# EAGLE board RS232_SelfPowered_Opto_Old (EAGLE 7.7.0)
RS232 Adapter using ACPL-827 Optocouplers Powered by PIC
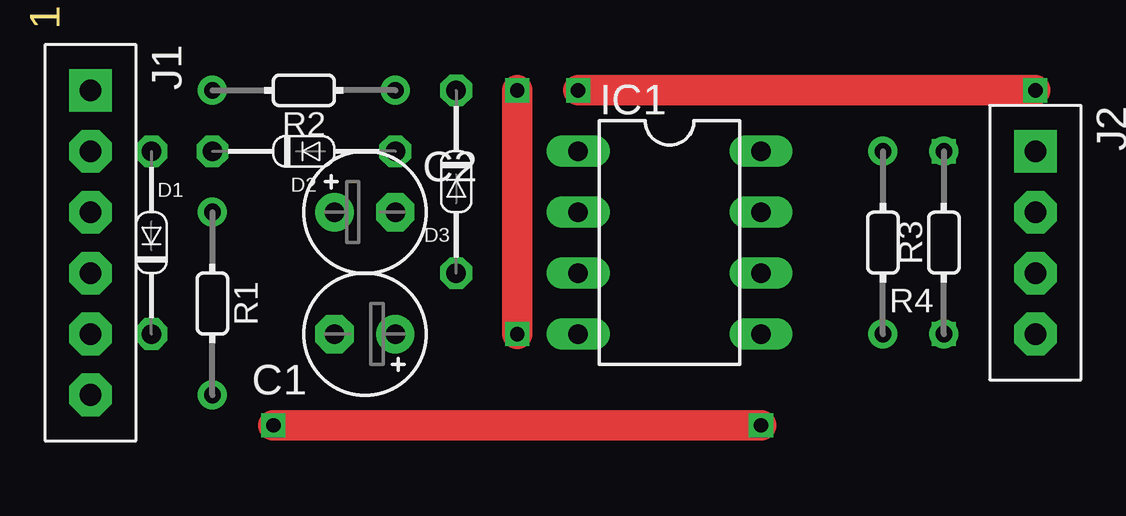
[diagram p0: board, top side]
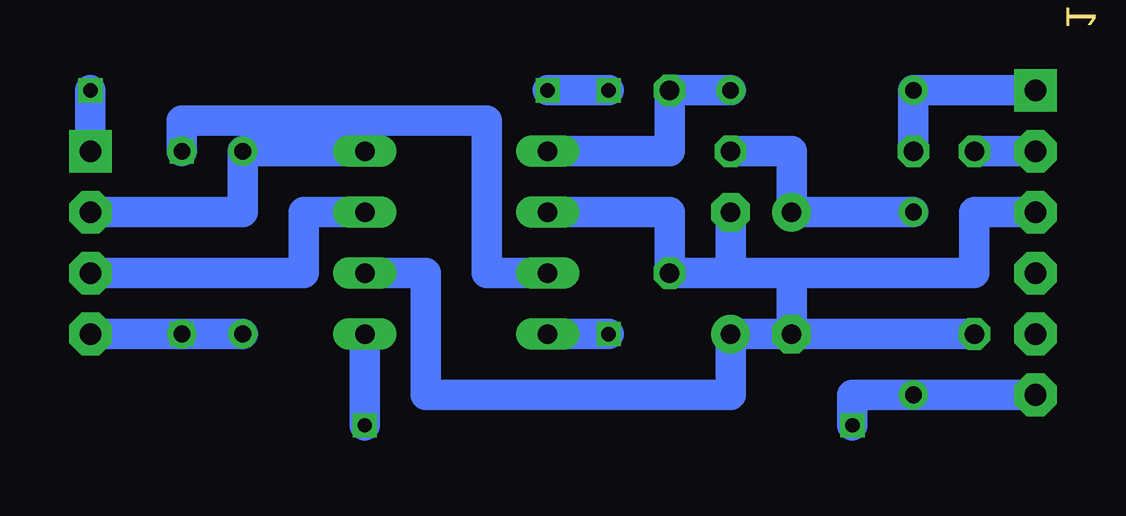
[diagram p1: board, bottom side, seen from below]

No outline drawn. Coordinates in mm, seen from the top.
Copper layers (1*16): Top 0.035mm / dielectric 1.5mm / Bottom 0.035mm
Design rules "default": minimum track width 10mil, minimum drill 24mil, track to track 8mil, track to pad 8mil, pad to pad 8mil, via to via 8mil, smd to smd 8mil, copper to edge 40mil, drill to drill 8mil, minimum pad ring 10mil, minimum via ring 8mil, stop-mask expansion 4mil, vias tented up to drill 0mil, thermal gap 10mil
Net classes: 0 default: drill 0.001 mm

## Footprints (pad centres in the part's own frame; a part is rotated, then mirrored left to right if it is on the bottom)
E2,5-5 = drill 0.813 pad 1.6: + -1.27,0 | drill 0.813 pad 1.6 octagon: - 1.27,0
DO34-7V = drill 0.813 octagon: A 0,3.81; C 0,-3.81
DO34-7 = drill 0.813 octagon: A -3.81,0; C 3.81,0
DIL08 = drill 0.813 long: 1 -3.81,-3.81; 2 -1.27,-3.81; 3 1.27,-3.81; 4 3.81,-3.81; 5 3.81,3.81; 6 1.27,3.81; 7 -1.27,3.81; 8 -3.81,3.81
CONN-6P = drill 0.9 pad 1.778 square: 1 1.905,1.905 | drill 0.9 pad 1.778 octagon: 2 4.445,1.905; 3 6.985,1.905; 4 9.525,1.905; 5 12.065,1.905; 6 14.605,1.905
CONN-4P = drill 0.9 pad 1.778 square: 1 1.905,1.905 | drill 0.9 pad 1.778 octagon: 2 4.445,1.905; 3 6.985,1.905; 4 9.525,1.905
0202/7 = drill 0.7: 1 0,3.81; 2 0,-3.81
0202/7-V = drill 0.7: 1 0,-3.81; 2 0,3.81

## Placement (x,y rotation side)
C1  47u  [E2,5-5]  49.53,15.24 180 top
C2  47u  [E2,5-5]  49.53,20.32 0 top
D1  1N914  [DO34-7V]  40.64,19.05 0 top
D2  1N914  [DO34-7]  46.99,22.86 180 top
D3  1N914  [DO34-7V]  53.34,21.59 180 top
IC1  ACPL-827  [DIL08]  62.23,19.05 270 top
J1  COMPORT-6PIN-6P  [CONN-6P]  36.2,27.3 270 top
J2  PIC-UART-4P  [CONN-4P]  75.56,24.77 270 top
R1  680Ω  [0202/7]  43.18,16.51 180 top
R2  1kΩ  [0202/7]  46.99,25.4 90 top
R3  470Ω  [0202/7]  73.66,19.05 0 top
R4  1kΩ  [0202/7-V]  71.12,19.05 180 top

## Library data of the parts
C1 C2 = rcl
D1-D3 = d
IC1 = opto-c
J1 J2 = pinconn
R1-R4 = r

## Nets
+5V: J2.4 R3.2 R4.2
DGND: IC1.7 J2.3
GND: C1.- C2.- D3.A IC1.2 J1.3
N$1: D1.A J1.2
N$2: C1.+ D1.C IC1.6
N$3: IC1.3 R3.1
N$4: IC1.4 J2.1
N$5: IC1.8 J2.2 R4.1
N$6: D3.C IC1.1 R2.2
N$9: C2.+ D2.A R1.2
N$10: IC1.5 J1.6 R1.1
N$11: D2.C J1.1 R2.1

## Tracks (layer width: path | path; a pad name or v marks a point on that pad's centre or on a via)
+5V  (via drill 0.6)
  Bottom 1.27: R4.2 R3.2 J2.4
  other vias: 73.66,15.24
DGND
  Bottom 1.27: J2.3 68.58,17.78 68.58,20.32 IC1.7
GND
  Bottom 1.27: J1.3 40.64,20.32 40.64,17.78 48.26,17.78 | 50.8,17.78 D3.A 53.34,20.32 IC1.2 | C1.- 48.26,17.78 | 48.26,17.78 50.8,17.78 | 50.8,17.78 C2.-
N$1
  Bottom 1.27: D1.A J1.2
N$2
  Bottom 1.27: D1.C C1.+ 50.8,12.7 63.5,12.7 63.5,17.78 IC1.6
N$3  (via drill 0.6)
  Bottom 1.27: R3.1 73.66,24.13 60.96,24.13 60.96,17.78 IC1.3
  other vias: 73.66,22.86
N$4  (via drill 0.6)
  Top 1.27: v55.88,15.24 v55.88,25.4 | v58.42,25.4 v77.47,25.4
  Bottom 1.27: IC1.4 v55.88,15.24 | v55.88,25.4 v58.42,25.4 | v77.47,25.4 J2.1
N$5  (1 unrouted)
  Bottom 1.27: IC1.8 R4.1 71.12,20.32 J2.2
N$6
  Bottom 1.27: R2.2 D3.C 53.34,22.86 IC1.1
N$9
  Bottom 1.27: D2.A 48.26,22.86 C2.+ R1.2
N$10  (via drill 0.6)
  Top 1.27: v66.04,11.43 v45.72,11.43
  Bottom 1.27: v45.72,11.43 45.72,12.7 R1.1 J1.6 | IC1.5 v66.04,11.43
N$11
  Bottom 1.27: J1.1 R2.1 D2.C